# EAGLE board smarty06 (EAGLE 6.5.0)

Size 98.73 x 99.05 mm. Coordinates in mm from the lower left corner, seen from the top.
Outline: 0,0 98.73,0 98.73,99.05 0,99.05 0,0
Copper layers (1*16): Top 0.035mm / dielectric 1.5mm / Bottom 0.035mm
Design rules "ITeadstudio *": minimum track width 6mil, minimum drill 12mil, track to track 6mil, track to pad 6mil, pad to pad 6mil, via to via 6mil, smd to smd 0mil, copper to edge 10mil, drill to drill 10mil, minimum pad ring 0mil, minimum via ring 6mil, stop-mask expansion 2mil, vias tented up to drill 100mil, thermal gap 10mil
Net classes: 0 default: width 0.203 mm, drill 0.203 mm, clearance 0.152 mm; 1 power: width 0.254 mm, drill 0.406 mm, clearance 0.152 mm; 2 thnet: width 0.203 mm, drill 0.203 mm, clearance 0.152 mm

## Footprints (pad centres in the part's own frame; a part is rotated, then mirrored left to right if it is on the bottom)
78LXX = drill 0.813 octagon: GND 0,1.905; IN 1.27,0; OUT -1.27,0
2,54/1,1 = drill 1.118 pad 2.54 octagon: 1 0,0
MA04-2 = drill 1.016 octagon: 1 -3.81,-1.27; 2 -3.81,1.27; 3 -1.27,-1.27; 4 -1.27,1.27; 5 1.27,-1.27; 6 1.27,1.27; 7 3.81,-1.27; 8 3.81,1.27
C0603 = smd 0.889 x 0.889: 1 -0.762,0; 2 0.762,0
C0805 = smd 1.016 x 1.397: 1 -0.889,0; 2 0.889,0
C025-050X050 = drill 0.813 octagon: 1 -1.27,0; 2 1.27,0
C050-024X044 = drill 0.813 octagon: 1 -2.54,0; 2 2.54,0
LED-RGB-THRU = drill 0.762 pad 0.889 long: 1 1.905,0; 2 0.635,0; 3 -0.635,0; 4 -1.905,0
DIL16 = drill 0.813 long: 1 -8.89,-3.81; 2 -6.35,-3.81; 3 -3.81,-3.81; 4 -1.27,-3.81; 5 1.27,-3.81; 6 3.81,-3.81; 7 6.35,-3.81; 8 8.89,-3.81; 9 8.89,3.81; 10 6.35,3.81; 11 3.81,3.81; 12 1.27,3.81; 13 -1.27,3.81; 14 -3.81,3.81; 15 -6.35,3.81; 16 -8.89,3.81
AVRISP = drill 0.9 pad 1.626: 1 -1.27,2.54; 2 1.27,2.54; 3 -1.27,0; 4 1.27,0; 5 -1.27,-2.54; 6 1.27,-2.54
SMRT-FEM-16 = smd 0.5 x 1.6: 1 -3.5,-2.4; 2 -3.5,2.4; 3 -2.5,-2.4; 4 -2.5,2.4; 5 -1.5,-2.4; 6 -1.5,2.4; 7 -0.5,-2.4; 8 -0.5,2.4; 9 0.5,-2.4; 10 0.5,2.4; 11 1.5,-2.4; 12 1.5,2.4; 13 2.5,-2.4; 14 2.5,2.4; 15 3.5,-2.4; 16 3.5,2.4
2P-5.0 = drill 1.168 pad 2.032 square: 1 -2.54,0 | drill 1.168 pad 2.032: 2 2.54,0
1X08-BIG = drill 1.016 pad 1.778 octagon: 1 -8.89,0; 2 -6.35,0; 3 -3.81,0; 4 -1.27,0; 5 1.27,0; 6 3.81,0; 7 6.35,0; 8 8.89,0
2X09-BIG = drill 1.016 pad 1.676 octagon: 1 -10.16,-1.27; 2 -10.16,1.27; 3 -7.62,-1.27; 4 -7.62,1.27; 5 -5.08,-1.27; 6 -5.08,1.27; 7 -2.54,-1.27; 8 -2.54,1.27; 9 0,-1.27; 10 0,1.27; 11 2.54,-1.27; 12 2.54,1.27; 13 5.08,-1.27; 14 5.08,1.27; 15 7.62,-1.27; 16 7.62,1.27; 17 10.16,-1.27; 18 10.16,1.27
1X09-BIG = drill 1.016 pad 1.778 octagon: 1 -10.16,0; 2 -7.62,0; 3 -5.08,0; 4 -2.54,0; 5 0,0; 6 2.54,0; 7 5.08,0; 8 7.62,0; 9 10.16,0
1X04 = drill 1.016 long: 1 -3.81,0; 2 -1.27,0; 3 1.27,0; 4 3.81,0
1X03 = drill 1.016 long: 1 -2.54,0; 2 0,0; 3 2.54,0
1X06 = drill 1.016 long: 1 -6.35,0; 2 -3.81,0; 3 -1.27,0; 4 1.27,0; 5 3.81,0; 6 6.35,0
1X02 = drill 1.016 long: 1 -1.27,0; 2 1.27,0
2X08 = drill 1.016 octagon: 1 -8.89,-1.27; 2 -8.89,1.27; 3 -6.35,-1.27; 4 -6.35,1.27; 5 -3.81,-1.27; 6 -3.81,1.27; 7 -1.27,-1.27; 8 -1.27,1.27; 9 1.27,-1.27; 10 1.27,1.27; 11 3.81,-1.27; 12 3.81,1.27; 13 6.35,-1.27; 14 6.35,1.27; 15 8.89,-1.27; 16 8.89,1.27
1X08 = drill 1.016 long: 1 -8.89,0; 2 -6.35,0; 3 -3.81,0; 4 -1.27,0; 5 1.27,0; 6 3.81,0; 7 6.35,0; 8 8.89,0
4P-6.0X6.0X5.0H = drill 1.016 pad 1.651 square: 1 -3.937,2.159 | drill 1.016 pad 1.651: 2 -3.937,-2.159; 3 3.937,-2.159; 4 3.937,2.159
LED3MM = drill 0.813 octagon: A -1.27,0; K 1.27,0
SEGMENT_BL-M12A881UR = drill 0.8 pad 1.676: 1 -8.89,-12; 2 -6.35,-12; 3 -3.81,-12; 4 -1.27,-12; 5 1.27,-12; 6 3.81,-12; 7 6.35,-12; 8 8.89,-12; 9 8.89,12; 10 6.35,12; 11 3.81,12; 12 1.27,12; 13 -1.27,12; 14 -3.81,12; 15 -6.35,12; 16 -8.89,12
CHIP-LED0603 = smd 0.8 x 0.8: A 0,-0.75; C 0,0.75
2P-SMD-5.0X3.2 = smd 1.778 x 2.032: 1 -2.159,0; 2 2.159,0
0204V = drill 0.813 octagon: 1 -1.27,0; 2 1.27,0
R0603 = smd 0.889 x 0.889: 1 -0.762,0; 2 0.762,0
0207/2V = drill 0.813 octagon: 1 -1.27,0; 2 1.27,0
R0603' = smd 1 x 1.1: 1 -0.85,0; 2 0.85,0
1X01 = drill 1.016 octagon: 1 0,0
MA03-2 = drill 1.016: 1 -2.54,-1.27 | drill 1.016 octagon: 2 -2.54,1.27; 3 0,-1.27; 4 0,1.27; 5 2.54,-1.27; 6 2.54,1.27
MA08-2 = drill 0.5 pad 0.7 octagon: A3 3.5,-0.5; A4_SDA 3.5,0.5; A5_SCL 2.5,0.5; D0_RX 2.5,-0.5; D1_TX 1.5,-0.5; D3~ 0.5,-0.5; D4 -0.5,-0.5; D5~ -3.5,0.5; D6~ -2.5,0.5; D7 -1.5,0.5; D8 -0.5,0.5; D9~ 0.5,0.5; D10~ 1.5,0.5; VCC -1.5,-0.5; VSS -2.5,-0.5 | drill 0.5 pad 0.7 square: GND -3.5,-0.5
EVQ-Q2 = smd 3.2 x 1.2: A -3.4,-2; A' 3.4,-2; B -3.4,2; B' 3.4,2
SOT89 = smd 0.8 x 1.4: 1 -1.524,-1.905; 3 1.524,-1.905 | smd 0.8 x 1.9: 2 0,-1.651 | smd 2.032 x 3.65: 4 0,0.94
TQFP32 = smd 1.27 x 0.559: 1 -4.293,2.8; 2 -4.293,2; 3 -4.293,1.2; 4 -4.293,0.4; 5 -4.293,-0.4; 6 -4.293,-1.2; 7 -4.293,-2; 8 -4.293,-2.8; 17 4.293,-2.8; 18 4.293,-2; 19 4.293,-1.2; 20 4.293,-0.4; 21 4.293,0.4; 22 4.293,1.2; 23 4.293,2; 24 4.293,2.8 | smd 0.559 x 1.27: 9 -2.8,-4.293; 10 -2,-4.293; 11 -1.2,-4.293; 12 -0.4,-4.293; 13 0.4,-4.293; 14 1.2,-4.293; 15 2,-4.293; 16 2.8,-4.293; 25 2.8,4.293; 26 2,4.293; 27 1.2,4.293; 28 0.4,4.293; 29 -0.4,4.293; 30 -1.2,4.293; 31 -2,4.293; 32 -2.8,4.293
DIP254P762X533-14 = drill 0.991 square: 1 -7.62,15.24 | drill 0.991: 2 -7.62,12.7; 3 -7.62,10.16; 4 -7.62,7.62; 5 -7.62,5.08; 6 -7.62,2.54; 7 -7.62,0; 8 0,0; 9 0,2.54; 10 0,5.08; 11 0,7.62; 12 0,10.16; 13 0,12.7; 14 0,15.24
SOT223 = smd 1.27 x 2.286: 1 -2.286,-3.175; 2 0,-3.175; 3 2.286,-3.175 | smd 3.556 x 2.159: TER 0,3.175
SOIC8 = smd 0.635 x 1.6: 1 -1.905,-3.683; 2 -0.635,-3.683; 3 0.635,-3.683; 4 1.905,-3.683; 5 1.905,3.683; 6 0.635,3.683; 7 -0.635,3.683; 8 -1.905,3.683
ARDUINO_PRO_MINI = drill 1.016 pad 1.88: 1 -7.62,12.7; 2 -7.62,10.16; 3 -7.62,7.62; 4 -7.62,5.08; 5 -7.62,2.54; 6 -7.62,0; 7 -7.62,-2.54; 8 -7.62,-5.08; 9 -7.62,-7.62; 10 -7.62,-10.16; 11 -7.62,-12.7; 12 -7.62,-15.24; 13 7.62,-15.24; 14 7.62,-12.7; 15 7.62,-10.16; 16 7.62,-7.62; 17 7.62,-5.08; 18 7.62,-2.54; 19 7.62,0; 20 7.62,2.54; 21 7.62,5.08; 22 7.62,7.62; 23 7.62,10.16; 24 7.62,12.7; A4 4.763,1.429; A5 4.763,3.969; A6 5.08,-15.24; A7 2.54,-15.24; BLK 6.35,15.24; GND 3.81,15.24; GRN -6.35,15.24; RXI -1.27,15.24; TXO -3.81,15.24; VCC 1.27,15.24

## Placement (x,y rotation side)
3.3VREG  [78LXX]  86.36,10.16 180 top
+  [2,54/1,1]  92.71,20.32 0 top
-  [2,54/1,1]  88.9,20.32 0 top
ANNAREF  [MA04-2]  20.95,15.24 90 top
ANNAREF2  [MA04-2]  69.85,55.88 0 top
ANNAREF3  [MA04-2]  95.25,10.16 90 top
ANNAREF4  [MA04-2]  57.15,74.93 180 top
ANNAREF_  [MA04-2]  31.75,58.42 0 top
C1  [C0603]  3.56,6.73 180 bottom
C2  [C0805]  3.81,9.4 180 bottom
C3  [C0603]  3.56,12.32 180 bottom
C4  [C0805]  3.81,15.24 180 bottom
C5  [C0603]  10.16,4.45 180 bottom
C6  [C0603]  10.16,14.99 180 bottom
C7  0.1uF  [C0805]  14.61,6.99 90 bottom
C8  [C0805]  20.95,5.08 180 bottom
C9  [C0805]  34.67,35.31 90 top
C10  [C0805]  34.67,40.51 90 top
C11  10uF  [C025-050X050]  83.19,15.24 90 top
C12  10uF  [C025-050X050]  80.01,5.08 90 top
C13  100nF  [C050-024X044]  80.01,12.7 270 top
D1  LED-RGB-CC-THRUCLEAR  [LED-RGB-THRU]  43.18,57.15 0 top
D2  LED-RGB-CC-THRUCLEAR  [LED-RGB-THRU]  96.52,55.88 90 top
D3  LED-RGB-CC-THRUCLEAR  [LED-RGB-THRU]  1.65,21.08 90 top
IC1  74LS595N  [DIL16]  81.28,38.86 180 top
ISP1  AVRISP-6  [AVRISP]  11.43,71.12 0 top
J1  CON-SMD-2X8-1.0MM  [SMRT-FEM-16]  12.7,4.45 180 top
J2  SCREW-TERMINAL-2P-3470110P1  [2P-5.0]  31.75,2.54 0 top
J3  SCREW-TERMINAL-2P-3470110P1  [2P-5.0]  31.75,6.35 180 top
JP1  [1X08-BIG]  46.99,12.7 90 top
JP2  [2X09-BIG]  38.1,71.12 0 top
JP3  [1X09-BIG]  38.1,74.93 0 top
JP4  [1X04]  87.63,5.08 0 top
JP5  [1X03]  81.28,20.32 0 top
JP6  [1X06]  53.34,60.96 270 top
JP7  [1X02]  60.96,60.96 90 top
JP8  [2X08]  81.28,29.21 180 top
JP9  [2X08]  81.28,48.26 0 top
JP10  [1X08]  53.85,13.84 270 top
JP11  [1X08]  60.45,13.84 270 top
K2  BUTTON-4P-3110040P1  [4P-6.0X6.0X5.0H]  10.16,58.42 90 top
K3  BUTTON-4P-3110040P1  [4P-6.0X6.0X5.0H]  19.05,58.42 90 top
LED1  [LED3MM]  95.25,1.27 0 top
LED3  [LED3MM]  3.81,71.12 0 top
LED4  [LED3MM]  3.81,76.2 0 top
LED8  [SEGMENT_BL-M12A881UR]  81.28,39.37 90 top
LED9  [CHIP-LED0603]  53.34,48.26 0 top
LED10  [CHIP-LED0603]  58.42,48.26 0 top
LED11  [CHIP-LED0603]  55.88,48.26 0 top
LED12  [CHIP-LED0603]  60.96,48.26 0 top
NRF  [MA04-2]  20.32,69.85 90 top
POWER  [1X02]  3.81,2.54 0 top
Q1  CRYSTAL  [2P-SMD-5.0X3.2]  10.29,9.91 90 bottom
R1  [0204V]  39.37,63.5 90 top
R2  10k  [R0603]  10.67,21.34 90 bottom
R3  [0204V]  43.18,63.5 90 top
R4  [0207/2V]  82.55,55.88 90 top
R5  [0207/2V]  86.36,55.88 90 top
R6  [0204V]  3.81,55.88 0 top
R7  [0204V]  3.81,59.69 0 top
R8  [0204V]  3.81,63.5 0 top
R9  [0204V]  3.81,67.31 0 top
R10  [R0603']  48.26,35.56 270 top
R11  [R0603']  48.26,40.64 270 top
R12  [R0603']  41.91,19.05 270 top
R13  [R0603']  41.91,5.08 90 top
R14  [0204V]  46.99,63.5 90 top
R15  [0207/2V]  90.17,55.88 90 top
R16  [R0603']  53.34,38.1 90 top
R17  [R0603']  60.96,31.75 270 top
R18  [R0603']  53.34,31.75 270 top
R19  [R0603']  60.96,38.1 270 top
R20  1k  [R0603]  16.51,21.59 270 top
R21  1k  [R0603]  13.97,21.59 270 top
R22  1k  [R0603]  11.43,21.59 270 top
R23  [R0603']  66.93,48.01 270 top
R24  [R0603']  66.93,32.77 270 top
R25  [R0603']  88.9,39.37 90 bottom
R26  [R0603']  73.66,39.37 270 bottom
R27  [R0603']  67.31,27.94 0 top
R28  [R0603']  77.47,39.37 270 bottom
R29  [R0603']  81.28,39.37 270 bottom
R30  [R0603']  85.09,39.37 270 bottom
R-LED1  120  [0204V]  85.09,1.27 0 top
RESET  [1X01]  19.05,76.2 0 top
RESET1  [1X01]  93.98,16.51 0 top
RST  [1X01]  19.68,21.59 0 top
RST1  [1X01]  76.2,57.15 0 top
SERVOS  [MA03-2]  31.75,29.21 0 top
SV1  [MA08-2]  31.75,39.37 90 top
SV2  [MA08-2]  31.75,12.7 90 top
SV3  [MA08-2]  44.45,39.37 90 top
SV4  [MA08-2]  44.45,12.7 90 top
SV5  CON-SMD-2X8-1.0MM  [SMRT-FEM-16]  88.9,67.31 270 top
SV6  [MA08-2]  66.67,39.62 90 top
SV7  [MA08-2]  57.15,12.7 90 top
SV8  [MA08-2]  57.15,39.37 90 top
SW1  SPST_TACT-EVQQ2  [EVQ-Q2]  44.45,46.99 0 top
SW2  SPST_TACT-EVQQ2  [EVQ-Q2]  44.45,30.48 0 top
U1  1117-3.3  [SOT89]  6.86,20.7 0 bottom
U2  ATMEGA328P  [TQFP32]  11.43,13.97 0 top
U3  ATTINY84-20PU  [DIP254P762X533-14]  74.93,3.81 0 top
U4  CJ1117-5.0-1310170P1  [SOT223]  31.75,46.99 270 top
U5  L9110  [SOIC8]  31.75,20.32 270 top
U$1  ARDUINO_PRO_MINI  [ARDUINO_PRO_MINI]  81.28,68.58 90 bottom
V  [1X01]  22.23,21.59 0 top
V1  [1X01]  76.2,54.61 0 top
VSS  [1X01]  21.59,76.2 0 top
VSS1  [1X01]  96.52,16.51 0 top

## Library data of the parts
3.3VREG = v-reg
+ - = wirepad
ANNAREF ANNAREF2-ANNAREF4 ANNAREF_ NRF SERVOS = con-lstb; OC_FARNELL: unknown; OC_NEWARK: unknown
C1-C10 J2 J3 K2 K3 Q1 R2 R20-R22 U1 U2 U4 = OPL
C11-C13 R6-R9 = rcl
D1-D3 = SparkFun-LED; PROD_ID: DIO-08418
IC1 = SparkFun-DigitalIC
ISP1 JP1-JP3 LED8-LED12 R10-R13 R16-R19 R23-R30 SW1 SW2 = adafruit
J1 SV5 U$1 = smarties
JP4-JP11 POWER RESET RESET1 RST RST1 V V1 VSS VSS1 = pinhead
LED1 LED3 LED4 = led
R1 R3-R5 R14 R15 R-LED1 = resistor
SV1-SV4 SV6-SV8 = smarties; OC_FARNELL: unknown; OC_NEWARK: unknown
U3 = Atmel_By_element14_Batch_1-00; MPN: ATTINY84-20PU; OC_FARNELL: -; OC_NEWARK: 58M3794; PACKAGE: PDIP-14; SUPPLIER: Atmel
U5 = con-1.0mm

## Nets
3.3V [power]: ANNAREF.2 C3.1 C4.1 C8.1 J1.12 R2.2 U1.2 U1.4 U2.4 U2.6 U2.18
84_3.3V [power]: ANNAREF3.2 U3.1
84_3V3: 3.3VREG.OUT C12.1 C13.2 LED1.A
84_CE: ANNAREF3.3 U3.3
84_CS: ANNAREF3.4 U3.2
84_GND [power]: 3.3VREG.GND -.1 ANNAREF3.1 C11.2 C12.2 C13.1 JP4.4 R-LED1.1 U3.14
84_GPIO1: JP5.1 U3.11
84_GPIO2: JP5.2 U3.10
84_GPIO3: JP5.3 U3.6
84_IRQ: ANNAREF3.8 U3.5
84_MISO: ANNAREF3.7 U3.8
84_MOSI: ANNAREF3.6 U3.7
84_RL1: JP4.2 U3.13
84_RL2: JP4.3 U3.12
84_RST: RESET1.1 U3.4
84_SCK: ANNAREF3.5 U3.9
84_VSS: 3.3VREG.IN +.1 C11.1 JP4.1 VSS1.1
AD0: R20.2 U2.23
AD1: R21.2 U2.24
AD2: R22.2 U2.25
AD3: J1.2 U2.26
AM_3.3V [power]: ANNAREF2.2 SV5.12 U$1.21
AM_A3: SV5.2 U$1.20
AM_CE: ANNAREF2.3 U$1.A6
AM_CS: ANNAREF2.4 U$1.A7
AM_GND [power]: ANNAREF2.1 D2.2 SV5.16 U$1.4 U$1.23
AM_IRQ: ANNAREF2.8 U$1.5
AM_MISO: ANNAREF2.7 U$1.15
AM_MOSI: ANNAREF2.6 U$1.14
AM_RST: RST1.1 U$1.3 U$1.22
AM_SCK: ANNAREF2.5 U$1.16
AM_VSS [power]: SV5.14 U$1.24 V1.1
ARSH_3.3V [power]: ANNAREF4.2 JP7.2
ARSH_CE: ANNAREF4.3 JP6.6
ARSH_CS: ANNAREF4.4 JP6.5
ARSH_GND [power]: ANNAREF4.1 JP6.1
ARSH_IRQ: ANNAREF4.8 JP7.1
ARSH_MISO: ANNAREF4.7 JP6.3
ARSH_MOSI: ANNAREF4.6 JP6.4
ARSH_SCK: ANNAREF4.5 JP6.2
CE: ANNAREF.3 U2.19
CE2: NRF.3 R6.2
COL1: IC1.15 LED8.13
COL2: IC1.1 LED8.3
COL3: IC1.2 LED8.4
COL4: IC1.3 LED8.10
COL5: IC1.4 LED8.6
COL6: IC1.5 LED8.11
COL7: IC1.6 LED8.15
COL8: IC1.7 LED8.16
CS: ANNAREF.4 U2.22
CSN2: NRF.4 R7.2
DV_3.3V [power]: ANNAREF_.2 JP2.18
DV_CE: ANNAREF_.3 JP2.15
DV_CS: ANNAREF_.4 JP2.7
DV_GND [power]: ANNAREF_.1 D1.2 JP3.9
DV_IRQ: ANNAREF_.8
DV_MISO: ANNAREF_.7 JP2.11
DV_MOSI: ANNAREF_.6 JP2.13
DV_SCK: ANNAREF_.5 JP2.9
GND [power]: ANNAREF.1 C1.2 C2.2 C3.2 C4.2 C5.1 C6.1 C7.2 C8.2 D3.2 J1.16 POWER.2 U1.1 U2.3 U2.5 U2.21
IA: SV2.D5~ U5.6
IB: SV2.D6~ U5.7
IRQ: ANNAREF.8 U2.32
IRQ2: K3.1 NRF.8
ISP_GND: ISP1.6 LED3.K LED4.K NRF.1 R8.1 R9.1
ISP_MISO: ISP1.1 NRF.7
ISP_MOSI: ISP1.4 NRF.6
ISP_RST: ISP1.5 K2.1 RESET.1
ISP_SCK: ISP1.3 NRF.5
ISP_VCC: ISP1.2 VSS.1
LD1: R16.2 SV8.D3~
LD2: R17.2 SV8.D5~
LD3: R18.2 SV8.D6~
LD4: R19.2 SV8.D9~
MDC_GND: J2.2 SV2.GND U5.5 U5.8
MDC_VCC: J2.1 U5.2 U5.3
MISO: ANNAREF.7 U2.16
MK_VCC: R10.2 R11.2 SV3.VCC
MOSI: ANNAREF.6 U2.15
MX_CLOCK: IC1.11 JP8.5 JP9.5 SV6.D10~
MX_DATA: IC1.14 JP9.9 SV6.D9~
MX_DATAOUT: IC1.9 JP8.9
MX_GND: IC1.8 IC1.13 JP8.3 JP9.3 SV6.GND
MX_LATCH: IC1.12 JP8.7 JP9.7 SV6.A3
MX_VCC: IC1.10 IC1.16 JP8.1 JP9.1 SV6.VCC
N$1: C7.1 U2.20
N$2: C6.2 Q1.2 U2.7
N$3: J3.1 U5.1
N$4: C5.2 Q1.1 U2.8
N$5: J3.2 U5.4
N$6: SV5.1 U$1.A4
N$7: SV5.3 U$1.A5
N$8: K3.4 R9.2
N$9: K2.4 R8.2
N$10: LED3.A R6.1
N$11: LED4.A R7.1
N$12: D1.4 R1.1
N$13: D1.3 R3.1
N$14: D1.1 R14.1
N$15: JP2.17 R14.2
N$16: R10.1 SV3.D0_RX SW1.A
N$17: R11.1 SV3.D1_TX SW2.A
N$18: SV3.GND SW1.B SW1.B' SW2.B SW2.B'
N$19: JP1.1 R12.2 R13.2 SV4.VCC
N$20: JP1.3 SV4.GND
N$21: JP1.4 R12.1 SV4.A5_SCL
N$22: JP1.5 R13.1 SV4.A4_SDA
N$23: D2.4 R4.2
N$24: R4.1 U$1.17
N$25: D2.3 R5.2
N$26: JP2.3 R3.2
N$27: JP2.1 R1.2
N$28: JP10.1 SV7.A4_SDA
N$29: SV5.7 U$1.12
N$30: SV5.9 U$1.11
N$31: SV5.11 U$1.10
N$32: SV5.13 U$1.9
N$33: SV5.15 U$1.8
N$34: SV5.10 U$1.7
N$35: SV5.8 U$1.6
N$36: SV5.5 U$1.13
N$37: SV5.6 U$1.1
N$38: SV5.4 U$1.2
N$39: R5.1 U$1.18
N$40: D2.1 R15.2
N$41: JP10.2 SV7.A5_SCL
N$42: D3.1 R20.1
N$43: JP10.3 SV7.D10~
N$44: JP10.4 SV7.D9~
N$45: JP10.5 SV7.D8
N$46: JP10.6 SV7.D7
N$47: SV6.VSS
N$48: JP10.7 SV7.D6~
N$49: SV6.A4_SDA
N$50: R15.1 U$1.19
N$51: LED1.K R-LED1.2
N$52: SV6.A5_SCL
N$53: JP10.8 SV7.D5~
N$54: JP11.1 SV7.A3
N$55: JP11.2 SV7.D0_RX
N$56: JP11.3 SV7.D1_TX
N$57: JP11.4 SV7.D3~
N$58: JP11.5 SV7.D4
N$59: JP11.6 SV7.VCC
N$60: JP11.7 SV7.VSS
N$61: JP11.8 SV7.GND
N$62: LED9.A R16.1
N$63: LED10.A R17.1
N$64: LED11.A R18.1
N$65: LED12.A R19.1
N$66: D3.3 R21.1
N$67: D3.4 R22.1
N$68: LED9.C LED10.C LED11.C LED12.C SV8.GND
N$69: R23.2 SV6.D0_RX
N$77: R24.2 SV6.D1_TX
N$78: R25.2 SV6.D3~
N$79: R26.2 SV6.D4
N$80: R27.1 SV6.D8
N$81: R28.1 SV6.D7
N$82: R29.1 SV6.D6~
N$83: R30.1 SV6.D5~
N$96: JP9.11
N$97: JP9.13
N$98: JP9.15
N$104: JP8.11
N$105: JP8.13
N$106: JP8.15
PIN3: J1.8 U2.1
PIN4: J1.10 U2.2
PIN5: J1.15 U2.9
PIN6: J1.13 U2.10
PIN7: J1.11 U2.11
PIN8: J1.9 U2.12
PIN9: J1.7 U2.13
PIN10: J1.5 U2.14
PWM1: SERVOS.5 SV1.D5~
PWM2: SERVOS.6 SV1.D6~
RESET: R2.1 RST.1 U2.29
ROW1: JP8.2 JP9.2 LED8.9 R23.1
ROW2: JP8.4 JP9.4 LED8.14 R24.1
ROW3: JP8.6 JP9.6 LED8.8 R25.1
ROW4: JP8.8 JP9.8 LED8.12 R26.1
ROW5: JP8.10 JP9.10 LED8.1 R30.2
ROW6: JP8.12 JP9.12 LED8.7 R29.2
ROW7: JP8.14 JP9.14 LED8.2 R28.2
ROW8: JP8.16 JP9.16 LED8.5 R27.2
RXI: J1.4 U2.30
SCK: ANNAREF.5 U2.17
SCL: J1.3 U2.28
SDA: J1.1 U2.27
SM_5V: C10.1 SERVOS.3 SERVOS.4 U4.2 U4.TER
SM_GND: C9.2 C10.2 SERVOS.1 SERVOS.2 SV1.GND U4.1
SM_VSS [power]: C9.1 SV1.VSS U4.3
TXO: J1.6 U2.31
VCC2: NRF.2
VSS [power]: C1.1 C2.1 J1.14 POWER.1 U1.3 V.1

## Tracks (layer width: path | path; a pad name or v marks a point on that pad's centre or on a via)
3.3V  (10 unrouted)
84_3.3V  (1 unrouted)
84_3V3  (3 unrouted)
84_CE  (1 unrouted)
84_CS  (1 unrouted)
84_GND  (8 unrouted)
84_GPIO1  (1 unrouted)
84_GPIO2  (1 unrouted)
84_GPIO3  (1 unrouted)
84_IRQ  (1 unrouted)
84_MISO  (1 unrouted)
84_MOSI  (1 unrouted)
84_RL1  (1 unrouted)
84_RL2  (1 unrouted)
84_RST  (1 unrouted)
84_SCK  (1 unrouted)
84_VSS  (4 unrouted)
AD0  (1 unrouted)
AD1  (1 unrouted)
AD2  (1 unrouted)
AD3  (1 unrouted)
AM_3.3V  (2 unrouted)
AM_A3  (1 unrouted)
AM_CE  (1 unrouted)
AM_CS  (1 unrouted)
AM_GND  (4 unrouted)
AM_IRQ  (1 unrouted)
AM_MISO  (1 unrouted)
AM_MOSI  (1 unrouted)
AM_RST  (2 unrouted)
AM_SCK  (1 unrouted)
AM_VSS  (2 unrouted)
ARSH_3.3V  (1 unrouted)
ARSH_CE  (1 unrouted)
ARSH_CS  (1 unrouted)
ARSH_GND  (1 unrouted)
ARSH_IRQ  (1 unrouted)
ARSH_MISO  (1 unrouted)
ARSH_MOSI  (1 unrouted)
ARSH_SCK  (1 unrouted)
CE  (1 unrouted)
CE2  (1 unrouted)
COL1  (1 unrouted)
COL2  (1 unrouted)
COL3  (1 unrouted)
COL4  (1 unrouted)
COL5  (1 unrouted)
COL6  (1 unrouted)
COL7  (1 unrouted)
COL8  (1 unrouted)
CS  (1 unrouted)
CSN2  (1 unrouted)
DV_3.3V  (1 unrouted)
DV_CE  (1 unrouted)
DV_CS  (1 unrouted)
DV_GND  (2 unrouted)
DV_MISO  (1 unrouted)
DV_MOSI  (1 unrouted)
DV_SCK  (1 unrouted)
GND  (15 unrouted)
IA  (1 unrouted)
IB  (1 unrouted)
IRQ  (1 unrouted)
IRQ2  (1 unrouted)
ISP_GND  (5 unrouted)
ISP_MISO  (1 unrouted)
ISP_MOSI  (1 unrouted)
ISP_RST  (2 unrouted)
ISP_SCK  (1 unrouted)
ISP_VCC  (1 unrouted)
LD1  (1 unrouted)
LD2  (1 unrouted)
LD3  (1 unrouted)
LD4  (1 unrouted)
MDC_GND  (3 unrouted)
MDC_VCC  (2 unrouted)
MISO  (1 unrouted)
MK_VCC  (2 unrouted)
MOSI  (1 unrouted)
MX_CLOCK  (3 unrouted)
MX_DATA  (2 unrouted)
MX_DATAOUT  (1 unrouted)
MX_GND  (4 unrouted)
MX_LATCH  (3 unrouted)
MX_VCC  (4 unrouted)
N$1  (1 unrouted)
N$2  (2 unrouted)
N$3  (1 unrouted)
N$4  (2 unrouted)
N$5  (1 unrouted)
N$6  (1 unrouted)
N$7  (1 unrouted)
N$8  (1 unrouted)
N$9  (1 unrouted)
N$10  (1 unrouted)
N$11  (1 unrouted)
N$12  (1 unrouted)
N$13  (1 unrouted)
N$14  (1 unrouted)
N$15  (1 unrouted)
N$16  (2 unrouted)
N$17  (2 unrouted)
N$18  (4 unrouted)
N$19  (3 unrouted)
N$20  (1 unrouted)
N$21  (2 unrouted)
N$22  (2 unrouted)
N$23  (1 unrouted)
N$24  (1 unrouted)
N$25  (1 unrouted)
N$26  (1 unrouted)
N$27  (1 unrouted)
N$28  (1 unrouted)
N$29  (1 unrouted)
N$30  (1 unrouted)
N$31  (1 unrouted)
N$32  (1 unrouted)
N$33  (1 unrouted)
N$34  (1 unrouted)
N$35  (1 unrouted)
N$36  (1 unrouted)
N$37  (1 unrouted)
N$38  (1 unrouted)
N$39  (1 unrouted)
N$40  (1 unrouted)
N$41  (1 unrouted)
N$42  (1 unrouted)
N$43  (1 unrouted)
N$44  (1 unrouted)
N$45  (1 unrouted)
N$46  (1 unrouted)
N$48  (1 unrouted)
N$50  (1 unrouted)
N$51  (1 unrouted)
N$53  (1 unrouted)
N$54  (1 unrouted)
N$55  (1 unrouted)
N$56  (1 unrouted)
N$57  (1 unrouted)
N$58  (1 unrouted)
N$59  (1 unrouted)
N$60  (1 unrouted)
N$61  (1 unrouted)
N$62  (1 unrouted)
N$63  (1 unrouted)
N$64  (1 unrouted)
N$65  (1 unrouted)
N$66  (1 unrouted)
N$67  (1 unrouted)
N$68  (4 unrouted)
N$69  (1 unrouted)
N$77  (1 unrouted)
N$78  (1 unrouted)
N$79  (1 unrouted)
N$80  (1 unrouted)
N$81  (1 unrouted)
N$82  (1 unrouted)
N$83  (1 unrouted)
PIN3  (1 unrouted)
PIN4  (1 unrouted)
PIN5  (1 unrouted)
PIN6  (1 unrouted)
PIN7  (1 unrouted)
PIN8  (1 unrouted)
PIN9  (1 unrouted)
PIN10  (1 unrouted)
PWM1  (1 unrouted)
PWM2  (1 unrouted)
RESET  (2 unrouted)
ROW1  (3 unrouted)
ROW2  (3 unrouted)
ROW3  (3 unrouted)
ROW4  (3 unrouted)
ROW5  (3 unrouted)
ROW6  (3 unrouted)
ROW7  (3 unrouted)
ROW8  (3 unrouted)
RXI  (1 unrouted)
SCK  (1 unrouted)
SCL  (1 unrouted)
SDA  (1 unrouted)
SM_5V  (4 unrouted)
SM_GND  (5 unrouted)
SM_VSS  (2 unrouted)
TXO  (1 unrouted)
VSS  (5 unrouted)
(copper drawn outside any net)
  shapes: Bottom area x7, Top area x7

## Text on the board
tNames: GND | SCK | 3.3V | MISO | MOSI | CS | IRQ | CE
tDocu: ISP | nRF24L01 | nRF24L01 | Arduino Pro Mini / Generic Smarty | R_Keys | nRF24L01 | nRF24L01 | R_LEDs | - | Servos / uShield | Buttons / uShield | LEDs / uShield | 11 | 10 | 6 | nRF24L01 | DC Motor / uShield | IMU uShield | - | + | - | + | - | Breakout / uShield | + | + | -
bDocu: RoboTal / Generic / Smartie | v1.0